# Altium PCB Tigershark 3D R1.4.PcbDoc (part 3 of 4)
Units mil, origin at the board's own origin, x right, y up, seen from the top; angles counter-clockwise.
Board outline 5500 x 4400 mil, 4 copper layers (Top Layer, Groun Plane, Power Plane, Bottom Layer); 262 components, 257 nets, 980 pads, 806 vias.
Unrouted connection lines stored in the file: 9.
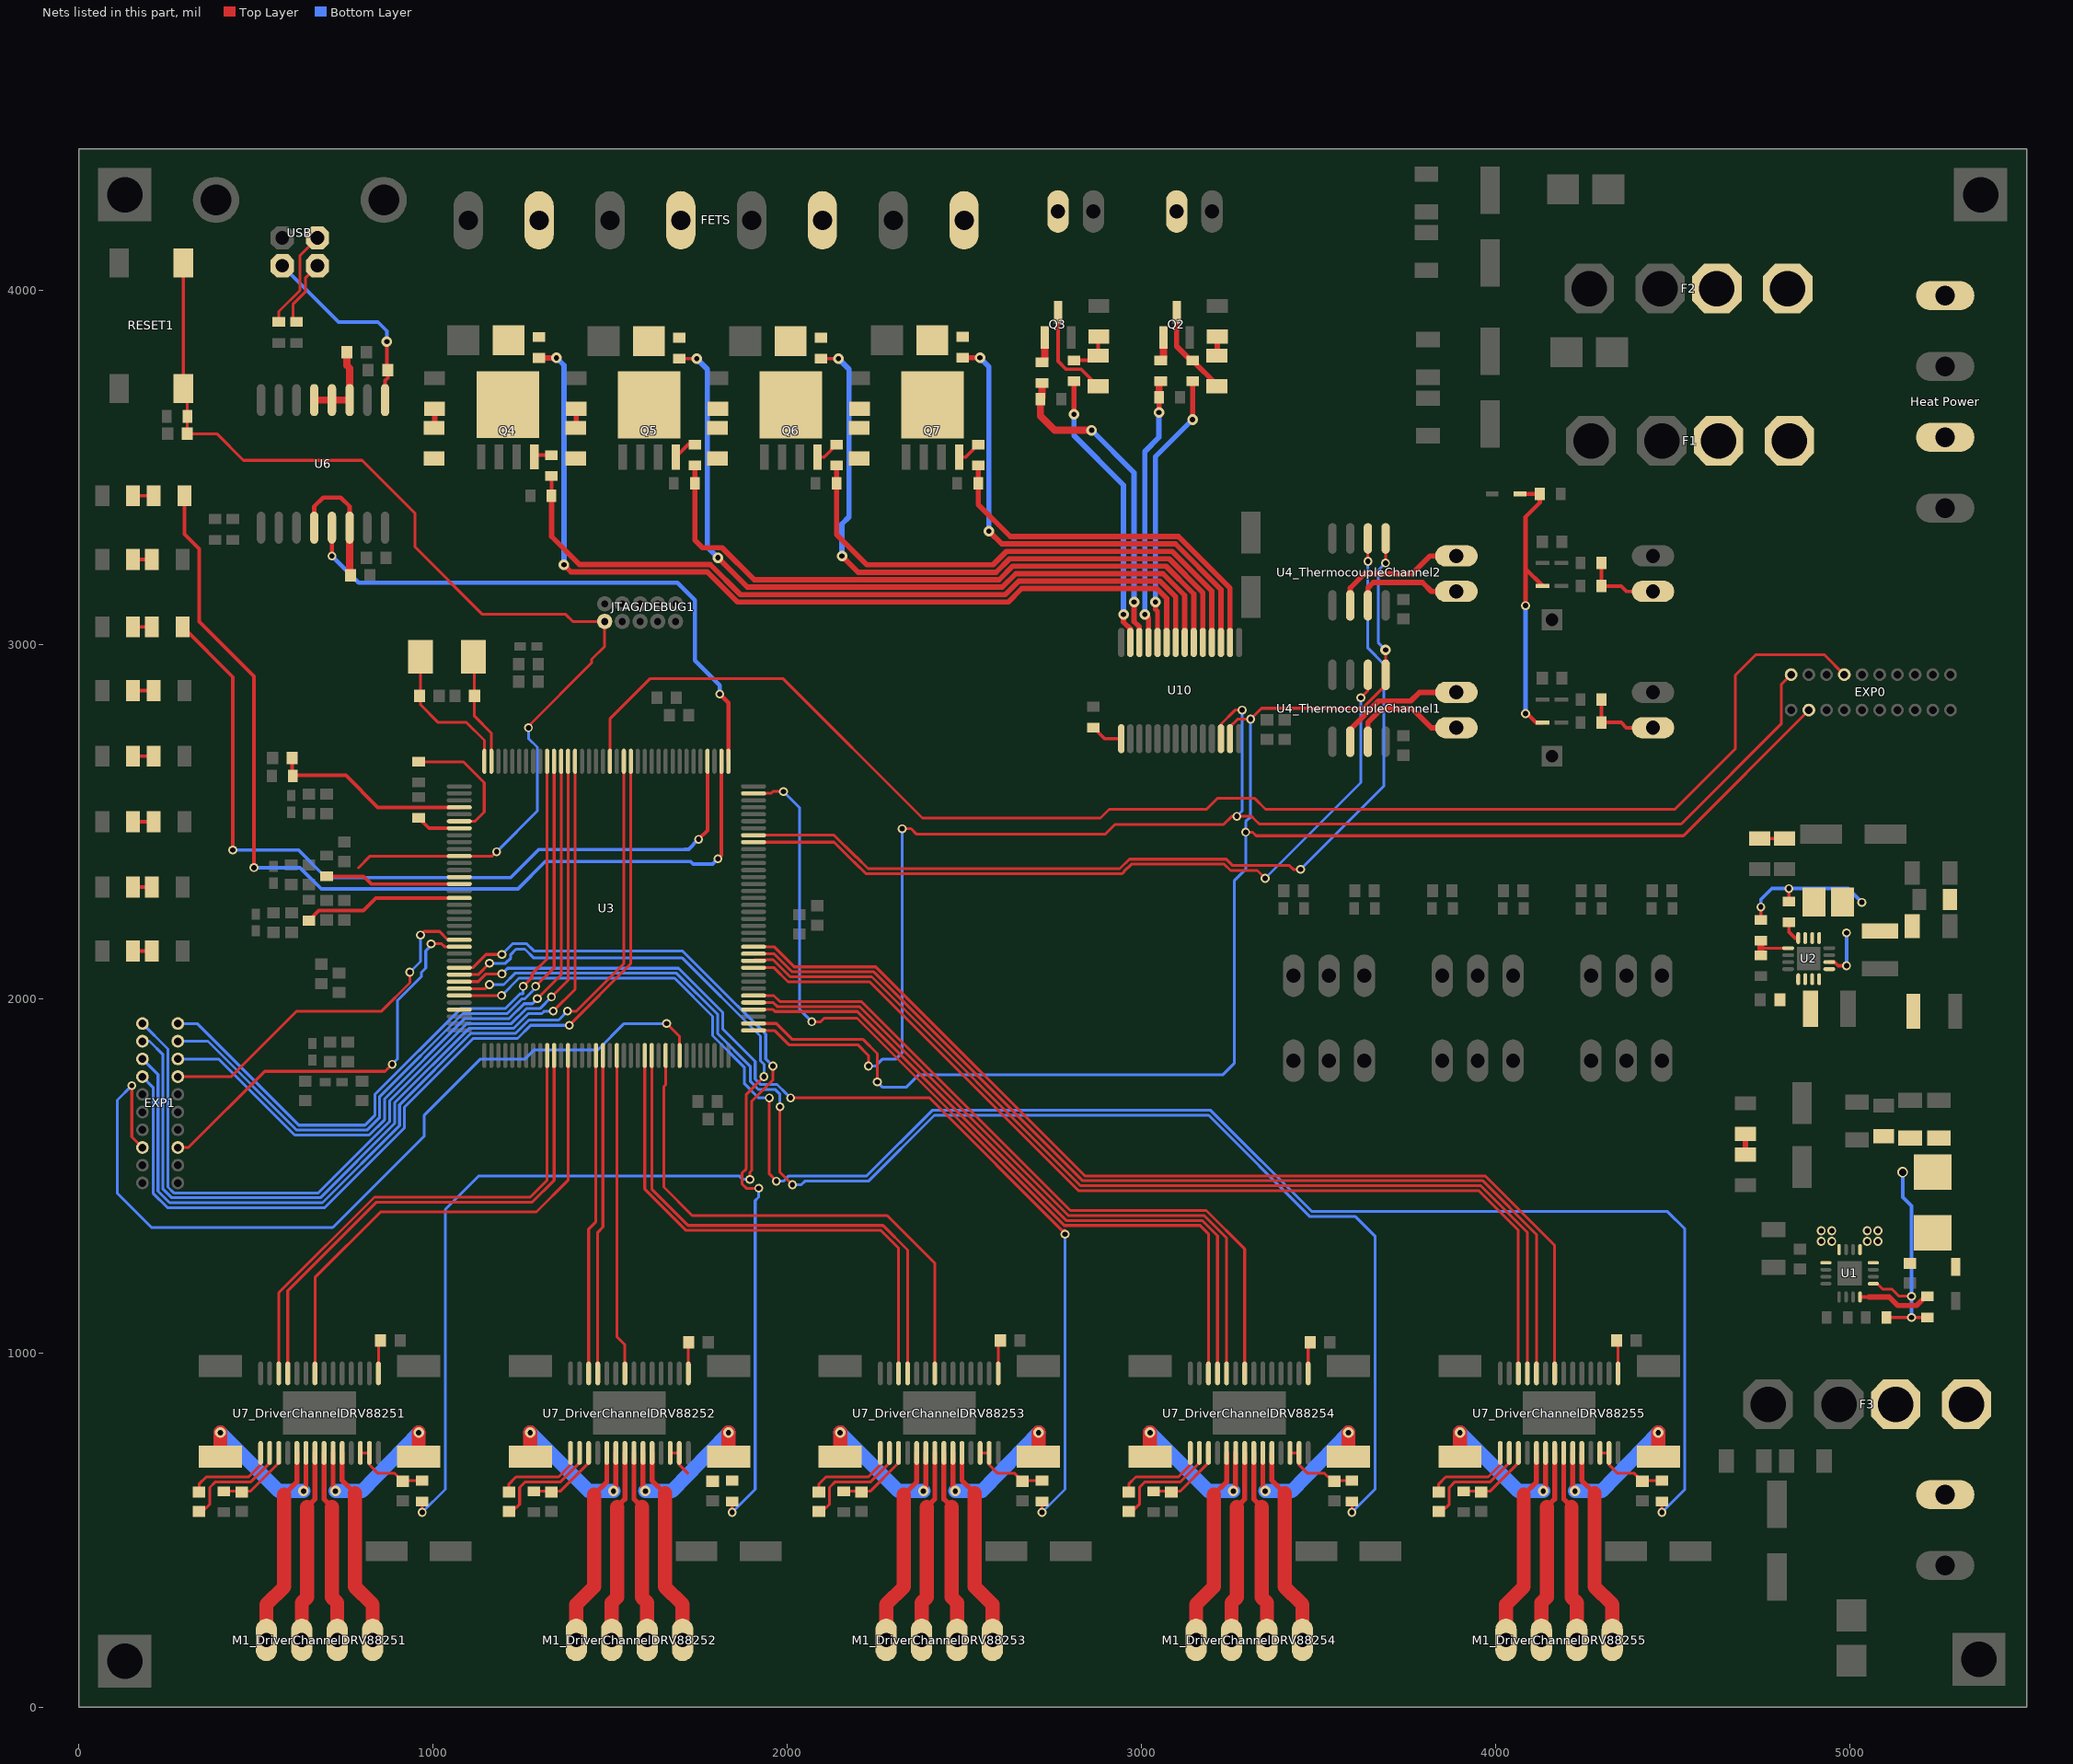
[diagram p5: the nets of this part, all layers, seen from the top]

## Via types
v1: diameter 25, hole 15, Top Layer to Bottom Layer, 373 vias
v2: diameter 30, hole 15, Top Layer to Bottom Layer, 334 vias
v3: diameter 19.68, hole 7.87, Top Layer to Bottom Layer, 75 vias
v4: diameter 50, hole 28, Top Layer to Bottom Layer, 12 vias
v5: diameter 50, hole 20, Top Layer to Bottom Layer, 9 vias
v6: diameter 30, hole 20, Top Layer to Bottom Layer, 3 vias

## Nets (pads, with @x,y where several pads share a name; then routed paths per layer and width w, separated by ;. In a path a pad name is that pad's centre, name@x,y a point inside that pad or via, vN(x,y) a via of type N, cw(c..) or ccw(c..) an arc to the next point about the centre after c; other vN are vias at no path point) (continued)
MOD0E4: U3.113 U7_DriverChannelDRV88254.24 | length 1993.5
  Top Layer w8: U3.113@1905.35,1989.25 1960.75,1989.25 1972.12,1977.88 2204.33,1977.88 2794.21,1388 3177.8,1388 3241.02,1324.78 U7_DriverChannelDRV88254.24@3241.02,942.2
MOD0E5: U3.120 U7_DriverChannelDRV88255.24 | length 2931.4
  Top Layer w8: U3.120@1905.35,2127.05 1963.56,2127.05 2014.72,2075.88 2244.92,2075.88 2834.8,1486 3964.8,1486 4116.02,1334.78 U7_DriverChannelDRV88255.24@4116.02,942.2
MOD1E1: U3.83 U7_DriverChannelDRV88251.25 | length 1466.6
  Top Layer w8: U7_DriverChannelDRV88251.25@590.43,942.2 590.43,1175.63 840.8,1426 1280.8,1426 1342.36,1487.56 U3.83@1342.36,1839.65
MOD1E2: U3.90 U7_DriverChannelDRV88252.25 | length 903.5
  Top Layer w8: U7_DriverChannelDRV88252.25@1465.43,942.2 1465.43,1340.43 1480.16,1355.16 U3.90@1480.16,1839.65
MOD1E3: U3.97 U7_DriverChannelDRV88253.25 | length 1519
  Top Layer w8: U3.97@1617.95,1839.65 1617.95,1462.85 1720.8,1360 2271.01,1360 2340.43,1290.57 U7_DriverChannelDRV88253.25@2340.43,942.2
MOD1E4: U3.112 U7_DriverChannelDRV88254.25 | length 1963.1
  Top Layer w8: U3.112@1905.35,1969.57 1960.43,1969.57 1966.12,1963.88 2198.53,1963.88 2788.41,1374 3172.01,1374 3215.43,1330.57 U7_DriverChannelDRV88254.25@3215.43,942.2
MOD1E5: U3.119 U7_DriverChannelDRV88255.25 | length 2903.2
  Top Layer w8: U3.119@1905.35,2107.36 1907.99,2110 1960.8,2110 2008.92,2061.88 2239.12,2061.88 2829.01,1472 3959.01,1472 4090.43,1340.57 U7_DriverChannelDRV88255.25@4090.43,942.2
MOD2E1: U3.82 U7_DriverChannelDRV88251.26 | length 1469.1
  Top Layer w8: U7_DriverChannelDRV88251.26@564.84,942.2 564.84,1169.84 835,1440 1275,1440 1322.68,1487.68 U3.82@1322.68,1839.65
MOD2E2: U3.89 U7_DriverChannelDRV88252.26 | length 906
  Top Layer w8: U7_DriverChannelDRV88252.26@1439.84,942.2 1439.84,1349.84 1460.47,1370.47 U3.89@1460.47,1839.65
MOD2E3: U3.96 U7_DriverChannelDRV88253.26 | length 1516.6
  Top Layer w8: U3.96@1598.27,1839.65 1598.27,1462.74 1715.01,1346 2265.21,1346 2314.84,1296.36 U7_DriverChannelDRV88253.26@2314.84,942.2
MOD2E4: U3.143 U7_DriverChannelDRV88254.26 | length 2540.2
  Top Layer w8: U3.143@1905.35,2579.8 1954.8,2579.8 1960,2585 v1(1990,2585) ; v1(2070,1935) 2095,1935 2105,1945 2197.61,1945 2782.61,1360 3166.21,1360 3189.84,1336.36 U7_DriverChannelDRV88254.26@3189.84,942.2
  Bottom Layer w8: v1(1990,2585) 2035,2540 2035,1970 v1(2070,1935)
MOD2E5: U3.118 U7_DriverChannelDRV88255.26 | length 2870.7
  Top Layer w8: U3.118@1905.35,2087.68 1963.33,2087.68 2003.12,2047.88 2233.32,2047.88 2823.21,1458 3953.21,1458 4064.84,1346.36 U7_DriverChannelDRV88255.26@4064.84,942.2
MODE0_EXP1: EXP1.1 U3.24 | length 2529.4
  Top Layer w8: v1(1335,2005) 1381.73,2051.73 U3.24@1381.73,2670.35
  Bottom Layer w8: EXP1.1@180,1930 252,1858 252,1468.4 268.4,1452 676.75,1452 878,1653.25 878,1711.95 1096.05,1930 1221.61,1930 1263.61,1972 1302,1972 v1(1335,2005)
MODE0_EXP2: EXP1.20 U3.27 | length 1965.7
  Top Layer w8: v1(1255,2035) 1280,2060 1280,2070 1322.68,2112.68 U3.27@1322.68,2670.35
  Bottom Layer w8: EXP1.20@280,1930 334.6,1930 621.6,1643 808.36,1643 836,1670.64 836,1729.34 1078.66,1972 1204.21,1972 1246.21,2014 1254,2014 1255,2015 v1(1255,2035)
MODE1_EXP1: EXP1.2 U3.23 | length 2548.8
  Top Layer w8: v1(1340,1965) 1401.42,2026.42 U3.23@1401.42,2670.35
  Bottom Layer w8: EXP1.2@180,1880 200,1880 238,1842 238,1462.6 262.6,1438 682.55,1438 892,1647.45 892,1706.15 1101.85,1916 1227.41,1916 1269.41,1958 1308,1958 1315,1965 v1(1340,1965)
MODE1_EXP2: EXP1.19 U3.26 | length 1976.5
  Top Layer w8: v1(1290,2035) 1342.36,2087.36 U3.26@1342.36,2670.35
  Bottom Layer w8: EXP1.19@280,1880 364.8,1880 615.8,1629 814.15,1629 850,1664.85 850,1723.55 1084.45,1958 1210.01,1958 1252.01,2000 1260,2000 1290,2030 v1(1290,2035)
MODE2_EXP1: EXP1.3 U3.16 | length 2605.5
  Top Layer w8: v1(1380,1965) 1405.2,1965 1539.21,2099.01 U3.16@1539.21,2670.35
  Bottom Layer w8: EXP1.3@180,1830 224,1786 224,1456.8 256.8,1424 688.35,1424 906,1641.65 906,1700.35 1107.65,1902 1233.21,1902 1271.21,1940 1355,1940 v1(1380,1965)
MODE2_EXP2: EXP1.18 U3.25 | length 1996
  Top Layer w8: v1(1295,2000) 1362.05,2067.05 U3.25@1362.05,2670.35
  Bottom Layer w8: EXP1.18@280,1830 395,1830 610,1615 819.95,1615 864,1659.05 864,1717.75 1090.25,1944 1215.81,1944 1257.81,1986 1281,1986 v1(1295,2000)
MOSI: EXP0.20 U3.109 U10.12 | length 4336.7
  Top Layer w8: U3.109@1905.35,1910.51 1964.49,1910.51 2005,1870 2200,1870 2230,1840 v1(2230,1810) ; v1(2325,2480) 2350,2480 2365,2465 2899.08,2465 2926,2491.93 3232.34,2491.93 3255.41,2515 v1(3270,2515) 3311.62,2515 3321.5,2505.12 3321.5,2504.91 3333.41,2493 4524.41,2493 4807,2775.59 4807,2887 EXP0.20@4835,2915 ; U10.12@3225.16,2734.17 3225.16,2775.16 3265,2815 v1(3285,2815)
  Bottom Layer w8: v1(2230,1810) 2250,1810 2270,1830 2307.59,1830 2325,1847.41 v1(2325,2480) ; v1(3270,2515) 3285,2530 v1(3285,2815)
NetC4_1: C4.1 C52.1 FB3.1 L2.2 R12.2 R37.2 U2.14 | length 554.1
  Top Layer w10: R37.2@4749.55,2222.71 v1(4749.55,2259.18) ; R12.2@4828.55,2274.71 v1(4828.55,2311.18) ; U2.14@4942.62,2103.34 4957.51,2103.34 4967.67,2093.18 v1(4991.55,2093.18)
  Bottom Layer w10: v1(4749.55,2259.18) 4749.55,2280.18 4780.55,2311.18 v1(4828.55,2311.18) 4995.55,2311.18 v1(5034.55,2272.18) ; v1(4991.55,2093.18) v1(4991.55,2186.18)
NetC22_1: C22.1 F4.1 U2.10 U2.11 U2.12 U2.13
NetC24_2: C24.2 U2.9
NetC43_2: C43.2 U3.36 X2.1 | length 416.3
  Top Layer w8: X2.1@965,2965 965,2830 1015,2780 1095,2780 1145.51,2729.49 U3.36@1145.51,2670.35
NetC44_2: C44.2 U3.35 X2.2 | length 315.6
  Top Layer w8: X2.2@1114.61,2965 1117.56,2962.05 C44.2@1117.56,2855 1117.56,2797.44 1165.2,2749.8 U3.35@1165.2,2670.35
NetC56_2: C56.2 U6.12 U6.14 | length 373.4
  Top Layer w12: U6.12@665,3329.88 665,3390 690,3415 740,3415 765,3390 U6.14@765,3329.88
  Top Layer w22: C56.2@765,3197.44 U6.14@765,3329.88
NetC58_2: C58.2 U6.1 USB.1 | length 566.7
  Top Layer w10: U6.1@865,3690.12 865,3745 872.56,3752.56 C58.2@872.56,3775 ; C58.2@870,3777.56 v2(870,3855)
  Bottom Layer w10: USB.1@575,4069 734,3910 845,3910 870,3885 v2(870,3855)
NetC59_2: C59.2 U6.3 U6.4 U6.5 | length 238
  Top Layer w20: U6.5@665,3690.12 U6.4@715,3690.12 U6.3@765,3690.12 765,3780 757.44,3787.56 C59.2@757.44,3825
NetC66_DriverChannelDRV88251_2: C66_DriverChannelDRV88251.2 R30_DriverChannelDRV88251.2 U7_DriverChannelDRV88251.3 | length 216.1
  Top Layer w8: R30_DriverChannelDRV88251.2@410,609.53 484.53,609.53 564.84,689.84 U7_DriverChannelDRV88251.3@564.84,717.8
NetC66_DriverChannelDRV88252_2: C66_DriverChannelDRV88252.2 R30_DriverChannelDRV88252.2 U7_DriverChannelDRV88252.3 | length 216.1
  Top Layer w8: R30_DriverChannelDRV88252.2@1285,609.53 1359.53,609.53 1439.84,689.84 U7_DriverChannelDRV88252.3@1439.84,717.8
NetC66_DriverChannelDRV88253_2: C66_DriverChannelDRV88253.2 R30_DriverChannelDRV88253.2 U7_DriverChannelDRV88253.3 | length 216.1
  Top Layer w8: R30_DriverChannelDRV88253.2@2160,609.53 2234.53,609.53 2314.84,689.84 U7_DriverChannelDRV88253.3@2314.84,717.8
NetC66_DriverChannelDRV88254_2: C66_DriverChannelDRV88254.2 R30_DriverChannelDRV88254.2 U7_DriverChannelDRV88254.3 | length 216.1
  Top Layer w8: R30_DriverChannelDRV88254.2@3035,609.53 3109.53,609.53 3189.84,689.84 U7_DriverChannelDRV88254.3@3189.84,717.8
NetC66_DriverChannelDRV88255_2: C66_DriverChannelDRV88255.2 R30_DriverChannelDRV88255.2 U7_DriverChannelDRV88255.3 | length 216.1
  Top Layer w8: R30_DriverChannelDRV88255.2@3910,609.53 3984.53,609.53 4064.84,689.84 U7_DriverChannelDRV88255.3@4064.84,717.8
NetC68_DriverChannelDRV88251_1: C68_DriverChannelDRV88251.1 U7_DriverChannelDRV88251.1 | length 256.6
  Top Layer w8: C68_DriverChannelDRV88251.1@350,607.56 340,617.56 340,630 360,650 480,650 513.66,683.66 U7_DriverChannelDRV88251.1@513.66,717.8
NetC68_DriverChannelDRV88251_2: C68_DriverChannelDRV88251.2 U7_DriverChannelDRV88251.2 | length 302.3
  Top Layer w8: C68_DriverChannelDRV88251.2@350,552.44 370,572.44 370,620 386,636 486,636 539.25,689.25 U7_DriverChannelDRV88251.2@539.25,717.8
NetC68_DriverChannelDRV88252_1: C68_DriverChannelDRV88252.1 U7_DriverChannelDRV88252.1 | length 256.6
  Top Layer w8: C68_DriverChannelDRV88252.1@1225,607.56 1215,617.56 1215,630 1235,650 1355,650 1388.66,683.66 U7_DriverChannelDRV88252.1@1388.66,717.8
NetC68_DriverChannelDRV88252_2: C68_DriverChannelDRV88252.2 U7_DriverChannelDRV88252.2 | length 302.3
  Top Layer w8: C68_DriverChannelDRV88252.2@1225,552.44 1245,572.44 1245,620 1261,636 1361,636 1414.25,689.25 U7_DriverChannelDRV88252.2@1414.25,717.8
NetC68_DriverChannelDRV88253_1: C68_DriverChannelDRV88253.1 U7_DriverChannelDRV88253.1 | length 256.6
  Top Layer w8: C68_DriverChannelDRV88253.1@2100,607.56 2090,617.56 2090,630 2110,650 2230,650 2263.66,683.66 U7_DriverChannelDRV88253.1@2263.66,717.8
NetC68_DriverChannelDRV88253_2: C68_DriverChannelDRV88253.2 U7_DriverChannelDRV88253.2 | length 302.3
  Top Layer w8: C68_DriverChannelDRV88253.2@2100,552.44 2120,572.44 2120,620 2136,636 2236,636 2289.25,689.25 U7_DriverChannelDRV88253.2@2289.25,717.8
NetC68_DriverChannelDRV88254_1: C68_DriverChannelDRV88254.1 U7_DriverChannelDRV88254.1 | length 256.6
  Top Layer w8: C68_DriverChannelDRV88254.1@2975,607.56 2965,617.56 2965,630 2985,650 3105,650 3138.66,683.66 U7_DriverChannelDRV88254.1@3138.66,717.8
NetC68_DriverChannelDRV88254_2: C68_DriverChannelDRV88254.2 U7_DriverChannelDRV88254.2 | length 302.3
  Top Layer w8: C68_DriverChannelDRV88254.2@2975,552.44 2995,572.44 2995,620 3011,636 3111,636 3164.25,689.25 U7_DriverChannelDRV88254.2@3164.25,717.8
NetC68_DriverChannelDRV88255_1: C68_DriverChannelDRV88255.1 U7_DriverChannelDRV88255.1 | length 256.6
  Top Layer w8: C68_DriverChannelDRV88255.1@3850,607.56 3840,617.56 3840,630 3860,650 3980,650 4013.66,683.66 U7_DriverChannelDRV88255.1@4013.66,717.8
NetC68_DriverChannelDRV88255_2: C68_DriverChannelDRV88255.2 U7_DriverChannelDRV88255.2 | length 302.3
  Top Layer w8: C68_DriverChannelDRV88255.2@3850,552.44 3870,572.44 3870,620 3886,636 3986,636 4039.25,689.25 U7_DriverChannelDRV88255.2@4039.25,717.8
NetC71_DriverChannelDRV88251_2: C71_DriverChannelDRV88251.2 U7_DriverChannelDRV88251.15 | length 94.4
  Top Layer w8: C71_DriverChannelDRV88251.2@842.44,1035 846.34,1031.1 U7_DriverChannelDRV88251.15@846.34,942.2
NetC71_DriverChannelDRV88252_2: C71_DriverChannelDRV88252.2 U7_DriverChannelDRV88252.15 | length 94.4
  Top Layer w8: C71_DriverChannelDRV88252.2@1717.44,1035 1721.34,1031.1 U7_DriverChannelDRV88252.15@1721.34,942.2
NetC71_DriverChannelDRV88253_2: C71_DriverChannelDRV88253.2 U7_DriverChannelDRV88253.15 | length 94.4
  Top Layer w8: C71_DriverChannelDRV88253.2@2592.44,1035 2596.34,1031.1 U7_DriverChannelDRV88253.15@2596.34,942.2
NetC71_DriverChannelDRV88254_2: C71_DriverChannelDRV88254.2 U7_DriverChannelDRV88254.15 | length 94.4
  Top Layer w8: C71_DriverChannelDRV88254.2@3467.44,1035 3471.34,1031.1 U7_DriverChannelDRV88254.15@3471.34,942.2
NetC71_DriverChannelDRV88255_2: C71_DriverChannelDRV88255.2 U7_DriverChannelDRV88255.15 | length 94.4
  Top Layer w8: C71_DriverChannelDRV88255.2@4342.44,1035 4346.34,1031.1 U7_DriverChannelDRV88255.15@4346.34,942.2
NetC73_2: C73.2 R23.2 U3.40 | length 558.7
  Top Layer w10: C73.2@602.56,2680 602.56,2630.75 754.25,2630.75 844.57,2540.43 U3.40@1074.65,2540.43
NetC75_DriverChannelDRV88251_2: C75_DriverChannelDRV88251.2 R31_DriverChannelDRV88251.1 U7_DriverChannelDRV88251.12 U7_DriverChannelDRV88251.13 | length 226.9
  Top Layer w8: U7_DriverChannelDRV88251.12@795.16,717.8 U7_DriverChannelDRV88251.13@820.75,717.8 820.75,684.25 845,660 892.56,660 913.03,639.53 R31_DriverChannelDRV88251.1@970,639.53
NetC75_DriverChannelDRV88252_2: C75_DriverChannelDRV88252.2 R31_DriverChannelDRV88252.1 U7_DriverChannelDRV88252.12 U7_DriverChannelDRV88252.13 | length 93.4
  Top Layer w8: U7_DriverChannelDRV88252.12@1670.16,717.8 U7_DriverChannelDRV88252.13@1695.75,717.8 1695.75,684.25 1720,660
NetC75_DriverChannelDRV88253_2: C75_DriverChannelDRV88253.2 R31_DriverChannelDRV88253.1 U7_DriverChannelDRV88253.12 U7_DriverChannelDRV88253.13 | length 226.9
  Top Layer w8: U7_DriverChannelDRV88253.12@2545.16,717.8 U7_DriverChannelDRV88253.13@2570.75,717.8 2570.75,684.25 2595,660 2642.56,660 2663.03,639.53 R31_DriverChannelDRV88253.1@2720,639.53
NetC75_DriverChannelDRV88254_2: C75_DriverChannelDRV88254.2 R31_DriverChannelDRV88254.1 U7_DriverChannelDRV88254.12 U7_DriverChannelDRV88254.13 | length 226.9
  Top Layer w8: U7_DriverChannelDRV88254.12@3420.16,717.8 U7_DriverChannelDRV88254.13@3445.75,717.8 3445.75,684.25 3470,660 3517.56,660 3538.03,639.53 R31_DriverChannelDRV88254.1@3595,639.53
NetC75_DriverChannelDRV88255_2: C75_DriverChannelDRV88255.2 R31_DriverChannelDRV88255.1 U7_DriverChannelDRV88255.12 U7_DriverChannelDRV88255.13 | length 226.9
  Top Layer w8: U7_DriverChannelDRV88255.12@4295.16,717.8 U7_DriverChannelDRV88255.13@4320.75,717.8 4320.75,684.25 4345,660 4392.56,660 4413.03,639.53 R31_DriverChannelDRV88255.1@4470,639.53
NetD2_1: D2.1 R19.1 | length 53.4
  Top Layer w10: D2.1@153.31,3050 R19.1@206.69,3050
NetD3_1: D3.1 R28.1 | length 53.4
  Top Layer w10: D3.1@153.31,3240 R28.1@206.69,3240
NetD7_2: D7.2 R8.1 | length 58.5
  Top Layer w15: D7.2@4706,1560 R8.1@4706,1618.46
NetD9_2: D9.2 R11.1 | length 70.5
  Top Layer w10: D9.2@4746.06,2452.41 4746.13,2452.49 R11.1@4816.55,2452.49
NetD10_1: D10.1 FAN-1.2 Q2.3 R14.2 | length 235.7
  Top Layer w15: Q2.3@3100,3915 3100,3842.15 3140.04,3802.1 R14.2@3145,3802.1 3213.5,3733.6 D10.1@3213.5,3729.19
NetD10_2: D10.2 R13.2 | length 54.1
  Top Layer w15: D10.2@3213.5,3815.8 3215,3817.3 R13.2@3215,3869.27
NetD11_1: D11.1 FAN-2.2 Q3.3 | length 280.8
  Top Layer w10: Q3.3@2765,3938.01 2765,3800.05 2787.73,3777.32 2830.37,3777.32 D11.1@2878.5,3729.19
NetD11_2: D11.2 R47.2 R48.2 | length 128.3
  Top Layer w10: R48.2@2810,3802.1 2864.8,3802.1 D11.2@2878.5,3815.8 2878.5,3867.77 R47.2@2880,3869.27
NetD12_1: D12.1 D13.1 FETS.2 Q4.5 R57.2
NetD13_2: D13.2 R56.1 | length 54.1
  Top Layer w8: D13.2@1003.5,3611.87 D13.2@1005,3613.36
  Top Layer w15: D13.2@1005,3613.36 R56.1@1005,3665.33
NetD14_1: D14.1 D15.1 FETS.4 Q5.5 R61.2
NetD14_2: D14.2 R60.1 | length 52
  Top Layer w15: D14.2@1405,3613.36 R60.1@1405,3665.33
NetD16_1: D16.1 D17.1 FETS.6 Q6.5 R65.2
NetD16_2: D16.2 R64.1
NetD18_1: D18.1 D19.1 FETS.8 Q7.5 R69.2
NetD18_2: D18.2 R68.1
NetD20_1: D20.1 R29.1 | length 53.4
  Top Layer w10: D20.1@153.31,2135 R29.1@206.69,2135
NetD21_1: D21.1 R34.1 | length 53.4
  Top Layer w10: D21.1@153.31,2315 R34.1@206.69,2315
NetD22_1: D22.1 R35.1 | length 58.4
  Top Layer w10: D22.1@153.31,2500 R35.1@211.69,2500
NetD23_1: D23.1 R36.1 | length 58.4
  Top Layer w10: D23.1@153.31,2685 R36.1@211.69,2685
NetD24_1: D24.1 R39.1 | length 58.4
  Top Layer w10: D24.1@153.31,2870 R39.1@211.69,2870
NetD25_1: D25.1 R40.1 | length 58.4
  Top Layer w8: D25.1@153.31,3420 R40.1@211.69,3420
NetF1_1: "Heat Power.3" F1.1
NetF2_1: "Heat Power.1" F2.1
NetF3_1: "Motor Power.1" F3.1
NetL2_1: L2.1 U2.1 U2.2 U2.3
NetM1_DriverChannelDRV88251_1: M1_DriverChannelDRV88251.1 U7_DriverChannelDRV88251.5 | length 563.4
  Top Layer w14: 580,600 616.02,636.02 U7_DriverChannelDRV88251.5@616.02,717.8
  Top Layer w40: M1_DriverChannelDRV88251.1@530,190 530,290 580,340 580,600
NetM1_DriverChannelDRV88251_2: M1_DriverChannelDRV88251.2 U7_DriverChannelDRV88251.7 | length 543.2
  Top Layer w14: 645,565 667.2,587.2 U7_DriverChannelDRV88251.7@667.2,717.8
  Top Layer w40: M1_DriverChannelDRV88251.2@630,190 630,295 645,310 645,565
NetM1_DriverChannelDRV88251_3: M1_DriverChannelDRV88251.3 U7_DriverChannelDRV88251.8 | length 543.2
  Top Layer w14: U7_DriverChannelDRV88251.8@692.8,717.8 692.8,587.2 715,565
  Top Layer w40: 715,565 715,310 730,295 M1_DriverChannelDRV88251.3@730,190
NetM1_DriverChannelDRV88251_4: M1_DriverChannelDRV88251.4 U7_DriverChannelDRV88251.10 | length 563.4
  Top Layer w14: U7_DriverChannelDRV88251.10@743.98,717.8 743.98,640 780,603.98
  Top Layer w40: 780,603.98 780,340 830,290 M1_DriverChannelDRV88251.4@830,190
NetM1_DriverChannelDRV88252_1: M1_DriverChannelDRV88252.1 U7_DriverChannelDRV88252.5 | length 563.4
  Top Layer w14: 1455,600 1491.02,636.02 U7_DriverChannelDRV88252.5@1491.02,717.8
  Top Layer w40: M1_DriverChannelDRV88252.1@1405,190 1405,290 1455,340 1455,600
NetM1_DriverChannelDRV88252_2: M1_DriverChannelDRV88252.2 U7_DriverChannelDRV88252.7 | length 543.2
  Top Layer w14: 1520,565 1542.2,587.2 U7_DriverChannelDRV88252.7@1542.2,717.8
  Top Layer w40: M1_DriverChannelDRV88252.2@1505,190 1505,295 1520,310 1520,565
NetM1_DriverChannelDRV88252_3: M1_DriverChannelDRV88252.3 U7_DriverChannelDRV88252.8 | length 543.2
  Top Layer w14: U7_DriverChannelDRV88252.8@1567.8,717.8 1567.8,587.2 1590,565
  Top Layer w40: 1590,565 1590,310 1605,295 M1_DriverChannelDRV88252.3@1605,190
NetM1_DriverChannelDRV88252_4: M1_DriverChannelDRV88252.4 U7_DriverChannelDRV88252.10 | length 563.4
  Top Layer w14: U7_DriverChannelDRV88252.10@1618.98,717.8 1618.98,640 1655,603.98
  Top Layer w40: 1655,603.98 1655,340 1705,290 M1_DriverChannelDRV88252.4@1705,190
NetM1_DriverChannelDRV88253_1: M1_DriverChannelDRV88253.1 U7_DriverChannelDRV88253.5 | length 563.4
  Top Layer w14: 2330,600 2366.02,636.02 U7_DriverChannelDRV88253.5@2366.02,717.8
  Top Layer w40: M1_DriverChannelDRV88253.1@2280,190 2280,290 2330,340 2330,600
NetM1_DriverChannelDRV88253_2: M1_DriverChannelDRV88253.2 U7_DriverChannelDRV88253.7 | length 543.2
  Top Layer w14: 2395,565 2417.2,587.2 U7_DriverChannelDRV88253.7@2417.2,717.8
  Top Layer w40: M1_DriverChannelDRV88253.2@2380,190 2380,295 2395,310 2395,565
NetM1_DriverChannelDRV88253_3: M1_DriverChannelDRV88253.3 U7_DriverChannelDRV88253.8 | length 543.2
  Top Layer w14: U7_DriverChannelDRV88253.8@2442.8,717.8 2442.8,587.2 2465,565
  Top Layer w40: 2465,565 2465,310 2480,295 M1_DriverChannelDRV88253.3@2480,190
NetM1_DriverChannelDRV88253_4: M1_DriverChannelDRV88253.4 U7_DriverChannelDRV88253.10 | length 563.4
  Top Layer w14: U7_DriverChannelDRV88253.10@2493.98,717.8 2493.98,640 2530,603.98
  Top Layer w40: 2530,603.98 2530,340 2580,290 M1_DriverChannelDRV88253.4@2580,190
NetM1_DriverChannelDRV88254_1: M1_DriverChannelDRV88254.1 U7_DriverChannelDRV88254.5 | length 563.4
  Top Layer w14: 3205,600 3241.02,636.02 U7_DriverChannelDRV88254.5@3241.02,717.8
  Top Layer w40: M1_DriverChannelDRV88254.1@3155,190 3155,290 3205,340 3205,600
NetM1_DriverChannelDRV88254_2: M1_DriverChannelDRV88254.2 U7_DriverChannelDRV88254.7 | length 543.2
  Top Layer w14: 3270,565 3292.2,587.2 U7_DriverChannelDRV88254.7@3292.2,717.8
  Top Layer w40: M1_DriverChannelDRV88254.2@3255,190 3255,295 3270,310 3270,565
NetM1_DriverChannelDRV88254_3: M1_DriverChannelDRV88254.3 U7_DriverChannelDRV88254.8 | length 543.2
  Top Layer w14: U7_DriverChannelDRV88254.8@3317.8,717.8 3317.8,587.2 3340,565
  Top Layer w40: 3340,565 3340,310 3355,295 M1_DriverChannelDRV88254.3@3355,190
NetM1_DriverChannelDRV88254_4: M1_DriverChannelDRV88254.4 U7_DriverChannelDRV88254.10 | length 563.4
  Top Layer w14: U7_DriverChannelDRV88254.10@3368.98,717.8 3368.98,640 3405,603.98
  Top Layer w40: 3405,603.98 3405,340 3455,290 M1_DriverChannelDRV88254.4@3455,190
NetM1_DriverChannelDRV88255_1: M1_DriverChannelDRV88255.1 U7_DriverChannelDRV88255.5 | length 563.4
  Top Layer w14: 4080,600 4116.02,636.02 U7_DriverChannelDRV88255.5@4116.02,717.8
  Top Layer w40: M1_DriverChannelDRV88255.1@4030,190 4030,290 4080,340 4080,600
NetM1_DriverChannelDRV88255_2: M1_DriverChannelDRV88255.2 U7_DriverChannelDRV88255.7 | length 543.2
  Top Layer w14: 4145,565 4167.2,587.2 U7_DriverChannelDRV88255.7@4167.2,717.8
  Top Layer w40: M1_DriverChannelDRV88255.2@4130,190 4130,295 4145,310 4145,565
NetM1_DriverChannelDRV88255_3: M1_DriverChannelDRV88255.3 U7_DriverChannelDRV88255.8 | length 543.2
  Top Layer w14: U7_DriverChannelDRV88255.8@4192.8,717.8 4192.8,587.2 4215,565
  Top Layer w40: 4215,565 4215,310 4230,295 M1_DriverChannelDRV88255.3@4230,190
NetM1_DriverChannelDRV88255_4: M1_DriverChannelDRV88255.4 U7_DriverChannelDRV88255.10 | length 563.4
  Top Layer w14: U7_DriverChannelDRV88255.10@4243.98,717.8 4243.98,640 4280,603.98
  Top Layer w40: 4280,603.98 4280,340 4330,290 M1_DriverChannelDRV88255.4@4330,190
NetP2_ThermistorChannel1_1: P2_ThermistorChannel1.1 R13_ThermistorChannel1.1 R14_ThermistorChannel1.2 | length 216.7
  Top Layer w10: R13_ThermistorChannel1.1@4299.53,2845 R14_ThermistorChannel1.2@4299.53,2780 4355,2780 4370,2765 P2_ThermistorChannel1.1@4445,2765
NetP2_ThermistorChannel2_1: P2_ThermistorChannel2.1 R13_ThermistorChannel2.1 R14_ThermistorChannel2.2 | length 216.7
  Top Layer w10: R13_ThermistorChannel2.1@4299.53,3230 R14_ThermistorChannel2.2@4299.53,3165 4355,3165 4370,3150 P2_ThermistorChannel2.1@4445,3150
NetQ2_1: Q2.1 R45.2 | length 57.4
  Top Layer w20: R45.2@3062.6,3809.7 Q2.1@3062.6,3867.14
NetQ3_1: Q3.1 R52.2 | length 62.4
  Top Layer w20: R52.2@2727.6,3804.7 Q3.1@2727.6,3867.14
NetQ4_4: Q4.4 R58.2 | length 50.5
  Top Layer w10: Q4.4@1286.5,3529.66 1291.36,3534.53 R58.2@1335,3534.53
NetQ5_4: Q5.4 R62.2 | length 68.6
  Top Layer w10: Q5.4@1686,3529.28 1721.25,3564.53 R62.2@1740,3564.53
NetQ6_4: Q6.4 R66.2 | length 68.6
  Top Layer w10: Q6.4@2086,3529.28 2104.75,3529.28 R66.2@2140,3564.53
NetQ7_4: Q7.4 R70.2 | length 68.6
  Top Layer w10: Q7.4@2486,3529.28 2504.75,3529.28 R70.2@2540,3564.53
NetR4_1: R4.1 U3.51 | length 383.6
  Top Layer w10: R4.1@700,2345.47 804.53,2345.47 826.1,2323.9 U3.51@1074.65,2323.9
NetR5_2: R5.2 U3.42 | length 358.7
  Top Layer w8: R5.2@975,2669.06 1085.94,2669.06 1145,2610 1145,2526.77 1119.29,2501.06 U3.42@1074.65,2501.06
NetR6_1: R6.1 U3.53 | length 451.8
  Top Layer w10: R6.1@650,2220.47 650,2221.46 677.73,2249.19 804.19,2249.19 839.53,2284.53 U3.53@1074.65,2284.53
NetR12_1: R12.1 U2.4 | length 60.4
  Top Layer w10: R12.1@4828.55,2215.65 4828.55,2189.18 4846.48,2171.25 U2.4@4855.02,2171.25
NetR14_1: R14.1 U10.24 | length 783.2
  Top Layer w14: v2(3040,3120) 3040,3100 3046.02,3093.98 U10.24@3046.02,3005.83 ; v2(3145,3635) R14.1@3145,3743.05
  Bottom Layer w14: v2(3040,3120) 3040,3530 v2(3145,3635)
NetR17_2: R17.2 U10.1 | length 91.6
  Top Layer w10: R17.2@2865,2765.47 2896.3,2734.17 U10.1@2943.66,2734.17
NetR22_2: R22.2 U3.43 | length 126.7
  Top Layer w10: R22.2@960,2510.47 989.09,2481.38 U3.43@1074.65,2481.38
NetR32_DriverChannelDRV88251_2: R32_DriverChannelDRV88251.2 U7_DriverChannelDRV88251.9 | length 483.3
  Top Layer w14: U7_DriverChannelDRV88251.9@718.39,717.8 718.39,616.61 v2(725,610)
  Top Layer w40: R32_DriverChannelDRV88251.2@960,707.05 v2(960,775)
  Bottom Layer w40: v2(725,610) 800,610 v2(960,775)
NetR32_DriverChannelDRV88252_2: R32_DriverChannelDRV88252.2 U7_DriverChannelDRV88252.9 | length 483.3
  Top Layer w14: U7_DriverChannelDRV88252.9@1593.39,717.8 1593.39,616.61 v2(1600,610)
  Top Layer w40: R32_DriverChannelDRV88252.2@1835,707.05 v2(1835,775)
  Bottom Layer w40: v2(1600,610) 1675,610 v2(1835,775)
NetR32_DriverChannelDRV88253_2: R32_DriverChannelDRV88253.2 U7_DriverChannelDRV88253.9 | length 483.3
  Top Layer w14: U7_DriverChannelDRV88253.9@2468.39,717.8 2468.39,616.61 v2(2475,610)
  Top Layer w40: R32_DriverChannelDRV88253.2@2710,707.05 v2(2710,775)
  Bottom Layer w40: v2(2475,610) 2550,610 v2(2710,775)
NetR32_DriverChannelDRV88254_2: R32_DriverChannelDRV88254.2 U7_DriverChannelDRV88254.9 | length 483.3
  Top Layer w14: U7_DriverChannelDRV88254.9@3343.39,717.8 3343.39,616.61 v2(3350,610)
  Top Layer w40: R32_DriverChannelDRV88254.2@3585,707.05 v2(3585,775)
  Bottom Layer w40: v2(3350,610) 3425,610 v2(3585,775)
NetR32_DriverChannelDRV88255_2: R32_DriverChannelDRV88255.2 U7_DriverChannelDRV88255.9 | length 483.3
  Top Layer w14: U7_DriverChannelDRV88255.9@4218.39,717.8 4218.39,616.61 v2(4225,610)
  Top Layer w40: R32_DriverChannelDRV88255.2@4460,707.05 v2(4460,775)
  Bottom Layer w40: v2(4225,610) 4300,610 v2(4460,775)
NetR33_DriverChannelDRV88251_2: R33_DriverChannelDRV88251.2 U7_DriverChannelDRV88251.6 | length 481.8
  Top Layer w14: v2(635,610) 641.61,616.61 U7_DriverChannelDRV88251.6@641.61,717.8
  Top Layer w40: R33_DriverChannelDRV88251.2@400,707.05 v2(400,775)
  Bottom Layer w40: v2(400,775) 565,610 v2(635,610)
NetR33_DriverChannelDRV88252_2: R33_DriverChannelDRV88252.2 U7_DriverChannelDRV88252.6 | length 481.8
  Top Layer w14: v2(1510,610) 1516.61,616.61 U7_DriverChannelDRV88252.6@1516.61,717.8
  Top Layer w40: R33_DriverChannelDRV88252.2@1275,707.05 v2(1275,775)
  Bottom Layer w40: v2(1275,775) 1440,610 v2(1510,610)
NetR33_DriverChannelDRV88253_2: R33_DriverChannelDRV88253.2 U7_DriverChannelDRV88253.6 | length 481.8
  Top Layer w14: v2(2385,610) 2391.61,616.61 U7_DriverChannelDRV88253.6@2391.61,717.8
  Top Layer w40: R33_DriverChannelDRV88253.2@2150,707.05 v2(2150,775)
  Bottom Layer w40: v2(2150,775) 2315,610 v2(2385,610)
NetR33_DriverChannelDRV88254_2: R33_DriverChannelDRV88254.2 U7_DriverChannelDRV88254.6 | length 481.8
  Top Layer w14: v2(3260,610) 3266.61,616.61 U7_DriverChannelDRV88254.6@3266.61,717.8
  Top Layer w40: R33_DriverChannelDRV88254.2@3025,707.05 v2(3025,775)
  Bottom Layer w40: v2(3025,775) 3190,610 v2(3260,610)
NetR33_DriverChannelDRV88255_2: R33_DriverChannelDRV88255.2 U7_DriverChannelDRV88255.6 | length 481.8
  Top Layer w14: v2(4135,610) 4141.61,616.61 U7_DriverChannelDRV88255.6@4141.61,717.8
  Top Layer w40: R33_DriverChannelDRV88255.2@3900,707.05 v2(3900,775)
  Bottom Layer w40: v2(3900,775) 4065,610 v2(4135,610)
NetR37_1: R37.1 R38.2 U2.5 | length 117.4
  Top Layer w8: 4750.02,2142.71 U2.5@4826.48,2142.71
  Top Layer w20: R38.2@4749.55,2122.71 R37.1@4749.55,2163.65
NetR45_1: R45.1 R46.1 U10.25 | length 760.5
  Top Layer w8: R45.1@3050.47,3738.52 R45.1@3055,3743.05
  Top Layer w15: v2(3010,3085) 3020.43,3074.57 U10.25@3020.43,3005.83 ; v2@3050.47,3654.53 R46.1@3050.47,3697.58
  Top Layer w20: R46.1@3050.47,3697.58 R45.1@3050.47,3738.52
  Bottom Layer w15: v2(3010,3085) 3010,3545 3050,3585 v2(3050,3655)
NetR48_1: R48.1 U10.27 | length 803.2
  Top Layer w15: v2(2810,3650) R48.1@2810,3743.05 ; v2(2950,3085) 2950,3063.59 2969.25,3044.34 U10.27@2969.25,3005.83
  Bottom Layer w15: v2(2810,3650) 2810,3590 2950,3450 v2(2950,3085)
NetR52_1: R52.1 R55.1 U10.26 | length 910.8
  Top Layer w8: R55.1@2715.47,3692.58 R55.1@2720,3697.1
  Top Layer w15: v2(2980,3120) 2980,3065 2994.84,3050.16 U10.26@2994.84,3005.83
  Top Layer w20: R55.1@2715.47,3692.58 2715.47,3645.47 2755.94,3605 v2(2860,3605) ; R55.1@2720,3697.1 R52.1@2720,3738.05
  Bottom Layer w15: v2(2860,3605) 2980,3485 v2(2980,3120)
NetR57_1: R57.1 U10.23 | length 2538.8
  Top Layer w15: R57.1@1300,3809.11 v2(1349.11,3809.11) ; v2(1370,3225) 1390,3205 1775,3205 1860,3120 2625,3120 2663,3158 3044.11,3158 3071.61,3130.5 U10.23@3071.61,3005.83
  Bottom Layer w15: v2(1349.11,3809.11) 1370,3788.22 v2(1370,3225)
NetR58_1: R58.1 R59.1 U10.22 | length 2163.5
  Top Layer w10: R59.1@1335,3420 R58.1@1335,3475.47
  Top Layer w15: R59.1@1335,3420 1335,3305 1414,3226 1783.7,3226 1868.7,3141 2616.3,3141 2654.3,3179 3052.81,3179 3097.2,3134.6 U10.22@3097.2,3005.83
NetR61_1: R61.1 U10.21 | length 2162.2
  Top Layer w10: R61.1@1696,3807.11 v2(1745.11,3807.11)
  Top Layer w15: v2(1805,3245) 1888,3162 2607.6,3162 2645.6,3200 3061.51,3200 3122.8,3138.71 U10.21@3122.8,3005.83
  Bottom Layer w15: v2(1745.11,3807.11) 1775,3777.22 1775,3275 v2(1805,3245)
NetR62_1: R62.1 R63.1 U10.20 | length 1850.4
  Top Layer w15: R62.1@1740,3505.47 1740,3295 1761.5,3273.5 1816.8,3273.5 1907.3,3183 2598.9,3183 2636.9,3221 3070.21,3221 3148.39,3142.82 U10.20@3148.39,3005.83
NetR65_1: R65.1 U10.19 | length 1861.1
  Top Layer w10: R65.1@2096,3807.11 v2(2145.11,3807.11)
  Top Layer w15: v2(2155,3250) 2201,3204 2590.21,3204 2628.21,3242 3078.9,3242 3173.98,3146.93 U10.19@3173.98,3005.83
  Bottom Layer w15: v2(2145.11,3807.11) 2175,3777.22 2175,3360 2155,3340 v2(2155,3250)
NetR66_1: R66.1 R67.1 U10.18 | length 1497.6
  Top Layer w15: R66.1@2140,3505.47 2140,3310 2225,3225 2581.51,3225 2619.51,3263 3087.6,3263 3199.57,3151.04 U10.18@3199.57,3005.83
NetR69_1: R69.1 U10.17 | length 1421.7
  Top Layer w15: R69.1@2496,3809.75 v2(2544.75,3809.75) ; v2(2570,3320) 2606,3284 3096.3,3284 3225.16,3155.14 U10.17@3225.16,3005.83
  Bottom Layer w15: v2(2544.75,3809.75) 2570,3784.5 v2(2570,3320)
NetR70_1: R70.1 R71.1 U10.16 | length 1072.3
  Top Layer w15: R70.1@2540,3505.47 2540,3395 2630,3305 3105,3305 3250.75,3159.25 U10.16@3250.75,3005.83
NetT2_ThermocoupleChannel1_1: T2_ThermocoupleChannel1.1 U4_ThermocoupleChannel1.3 | length 343.7
  Top Layer w15: U4_ThermocoupleChannel1.3@3640,2725.51 3640,2780.55 3678.94,2819.49 3765,2819.49 3819.49,2765 T2_ThermocoupleChannel1.1@3890,2765
NetT2_ThermocoupleChannel1_2: T2_ThermocoupleChannel1.2 U4_ThermocoupleChannel1.2 | length 378.1
  Top Layer w15: U4_ThermocoupleChannel1.2@3590,2725.51 3590,2760.25 3670.24,2840.49 3761,2840.49 3785.51,2865 T2_ThermocoupleChannel1.2@3890,2865
NetT2_ThermocoupleChannel2_1: T2_ThermocoupleChannel2.1 U4_ThermocoupleChannel2.3 | length 316.1
  Top Layer w15: U4_ThermocoupleChannel2.3@3640,3110.51 3640,3160 3655,3175 3794.49,3175 3819.49,3150 T2_ThermocoupleChannel2.1@3890,3150
NetT2_ThermocoupleChannel2_2: T2_ThermocoupleChannel2.2 U4_ThermocoupleChannel2.2 | length 386.5
  Top Layer w15: U4_ThermocoupleChannel2.2@3590,3110.51 3590,3159.49 3630.51,3200 3765,3200 3815,3250 T2_ThermocoupleChannel2.2@3890,3250
NRST: U3.69
OVREF: D1.2 D11_ThermistorChannel1.2 D11_ThermistorChannel2.2 R1.1 | length 822.2
  Top Layer w12: D1.2@4069.37,3425 R1.1@4125.47,3425 4125.47,3400.47 4085,3360 4085,3213.43 ; v1@4085,2810 4115,2780 D11_ThermistorChannel1.2@4133.43,2780 ; v1(4085,3110) 4085,3213.43 ; D11_ThermistorChannel2.2@4133.43,3165 4085,3213.43
  Bottom Layer w12: v1(4085,2805) v1(4085,3110)
PG: R9.2 U1.8 | length 214
  Top Layer w10: U1.8@5029.53,1158.07 5055,1158.07
  Top Layer w15: 5055,1158.07 5111.93,1158.07 5136,1134 5189,1134 5213.07,1158.07 R9.2@5223.54,1158.07
PWR_LED: R40.2 U3.2 | length 2787.2
  Top Layer w10: R40.2@298.31,3420 298.31,3311.69 340,3270 340,3065 495,2910 v1(495,2370) ; v1(1805,2395) 1814.8,2404.8 U3.2@1814.8,2670.35
  Bottom Layer w10: v1(495,2370) 625,2370 685,2310 1240,2310 1317.5,2387.5 1727.5,2387.5 1735,2380 1790,2380 v1(1805,2395)
R_N: R18.2 USB.2 | length 191.3
  Top Layer w8: R18.2@615,3910.53 605,3920.53 605,3960.2 640,3995.2 640,4034.79 USB.2@674.21,4069
R_P: R20.2 USB.3 | length 282.7
  Top Layer w8: R20.2@565,3910.53 565,3940 625,4000 625,4098.79 USB.3@674.21,4148
REF1: R31_DriverChannelDRV88251.2 U3.63 | length 3260
  Top Layer w8: v1(970,550) R31_DriverChannelDRV88251.2@970,580.47 ; U3.63@1074.65,2087.68 1112.68,2087.68 1150,2125 v1(1195,2125) ; v1(1895,1490) 1895,1510 1900,1515 1900,1710 1960,1770 v1(1960,1810)
  Bottom Layer w8: v1(970,550) 1035,615 1035,1405 1130,1500 1865,1500 1875,1490 v1(1895,1490) ; v1(1195,2125) 1225,2155 1265,2155 1285,2135 1704.31,2135 1859.96,1979.35 1860.65,1979.35 1940,1900 1940,1830 v1(1960,1810)
REF2: R31_DriverChannelDRV88252.2 U3.64 | length 2464
  Top Layer w8: U3.64@1074.65,2067.99 1127.99,2067.99 v1(1160,2100) ; v1(1845,550) R31_DriverChannelDRV88252.2@1845,580.47 ; v1(1920,1465) 1885,1465 1872.5,1477.5 1872.5,1507.3 1885,1519.8 1885,1730 v1(1935,1780)
  Bottom Layer w8: v1(1160,2100) 1205,2100 1220,2115 1220,2125 1235,2140 1260,2140 1285,2115 1704.51,2115 1925,1894.51 1925,1825 1935,1815 v1(1935,1780) ; v1(1845,550) 1910,615 1910,1430 1920,1440 v1(1920,1465)
REF3: R31_DriverChannelDRV88253.2 U3.65 | length 2929
  Top Layer w8: U3.65@1074.65,2048.31 1128.11,2048.31 1149.8,2070 v1(1195,2070) ; v1(2010,1720) 2402.82,1720 2776.82,1346 2785,1346 v1(2785,1335) ; v1(2720,550) R31_DriverChannelDRV88253.2@2720,580.47
  Bottom Layer w8: v1(1195,2070) 1211,2086 1693.91,2086 1817.96,1961.95 1817.96,1915.22 1910,1823.18 1910,1773.18 1925.68,1757.5 1944.32,1757.5 1945.01,1758.19 1971.81,1758.19 2000,1730 ; v1(2720,550) 2785,615 v1(2785,1335)
REF4: R31_DriverChannelDRV88254.2 U3.66 | length 4096.5
  Top Layer w8: U3.66@1074.65,2028.62 1148.62,2028.62 v1(1160,2040) ; v1(1980,1695) 1980,1510 v1(2015,1475) ; v1(3595,550) R31_DriverChannelDRV88254.2@3595,580.47
  Bottom Layer w8: v1(1160,2040) 1200,2040 1232,2072 1688.11,2072 1803.96,1956.15 1803.96,1901.64 1896,1809.6 1896,1767.38 1919.88,1743.5 1950.12,1743.5 1950.81,1744.19 1965.81,1744.19 1980,1730 v1(1980,1695) ; v1(2015,1475) 2040,1475 2050,1485 2229.8,1485 2415.8,1671 3190.41,1671 3476.41,1385 3605,1385 3660,1330 3660,615 v1(3595,550)
REF5: R31_DriverChannelDRV88255.2 U3.67 | length 4981.7
  Top Layer w8: U3.67@1074.65,2008.94 v1(1193.94,2008.94) ; v1(1950,1720) 1950,1505 v1(1970,1485) ; v1(4470,550) R31_DriverChannelDRV88255.2@4470,580.47
  Bottom Layer w8: v1(1193.94,2008.94) 1243,2058 1682.32,2058 1789.96,1950.36 1789.96,1895.84 1880,1805.8 1880,1760 1920,1720 v1(1950,1720) ; v1(1970,1485) 1990,1485 2005,1500 2225,1500 2410,1685 3196.21,1685 3482.21,1399 4486,1399 4535,1350 4535,615 v1(4470,550)
REF_EXP1: EXP1.8 U3.101 | length 2478.2
  Top Layer w8: v1(150,1755) 150,1610 EXP1.8@180,1580 ; v1(1660,1930) 1696.69,1893.31 U3.101@1696.69,1839.65
  Bottom Layer w8: v1(150,1755) 109,1714 109,1450.8 205.8,1354 717.34,1354 976,1612.66 976,1671.36 1134.64,1830 1260.2,1830 1285.2,1855 1465.2,1855 1540.2,1930 v1(1660,1930)
REF_EXP2: EXP1.13 U3.60 | length 1171
  Top Layer w8: EXP1.13@280,1580 310,1580 525,1795 865,1795 v1(885,1815) ; v1(995,2155) 1025,2155 1033.27,2146.73 U3.60@1074.65,2146.73
  Bottom Layer w8: v1(885,1815) 900,1830 900,1995 967.5,2062.5 967.5,2074.32 980,2086.82 980,2135 995,2150 v1(995,2155)
RESET: C63.2 JTAG/DEBUG1.10 R21.1 RESET1.1 U3.47 | length 3144.6
  Top Layer w8: RESET1.1@295.55,4077.17 RESET1.1@295.55,3722.83 306.56,3711.83 C63.2@306.56,3595 390,3595 465,3520 800,3520 950,3370 950,3275 1140,3085 1375,3085 1395,3065 JTAG/DEBUG1.10@1485,3065 1485,2994.8 1448.5,2958.3 1448.5,2948.5 v1@1267.5,2767.5 ; 790,2370 822.64,2402.64 U3.47@1074.65,2402.64 1167.64,2402.64 v1(1180,2415)
  Bottom Layer w8: v1(1180,2415) 1295,2530 1295,2710 1270,2735 v1(1270,2765)
RX_LED: R19.2 U3.4 | length 2311.6
  Top Layer w10: R19.2@293.31,3050 435,2908.31 v1(435,2420) ; v1(1750,2450) 1775.43,2475.43 U3.4@1775.43,2670.35
  Bottom Layer w10: v1(435,2420) 620.25,2420 698.25,2342 1219.88,2342 1298.88,2421 1710.75,2421 1711.75,2422 1722,2422 v1(1750,2450)
RXD1: EXP0.17 U3.18 | length 4176.3
  Top Layer w8: U3.18@1499.84,2670.35 1499.84,2789.84 1614,2904 1988.22,2904 2382.22,2510 2884.68,2510 2909.68,2535 3184.2,2535 3214.7,2565.5 3320.52,2565.5 3351.02,2535 4507.01,2535 4677,2704.99 4677,2912.8 4735.2,2971 4929,2971 EXP0.17@4985,2915
SCLK: EXP0.2 U3.110 U4_ThermocoupleChannel1.5 U4_ThermocoupleChannel2.5 U10.13 | length 5192.7
  Top Layer w8: U3.110@1905.35,1930.2 1969.8,1930.2 2015,1885 2215,1885 2255,1845 v1(2255,1765) ; U10.13@3250.75,2734.17 3250.75,2767.73 3272.39,2789.38 v1(3308.75,2789.38) 3339.38,2820 3625,2820 3690,2885 U4_ThermocoupleChannel1.5@3690,2914.49 v2(3690,2985) ; v1(3295,2470) 3315,2470 3325,2460 4531.01,2460 4885,2813.99 EXP0.2@4885,2815 ; v1(3690,3230) U4_ThermocoupleChannel2.5@3690,3299.49
  Bottom Layer w8: v1(2255,1765) 2270,1750 2336.41,1750 2371.41,1785 3230,1785 3262.5,1817.5 3262.5,2332.5 3295,2365 v1(3295,2470) 3295,2500 3308.75,2513.75 v1(3308.75,2789.38) ; v2(3690,2985) 3669,3006 3669,3209 v1(3690,3230)
SHDN: U3.50
SPD: U3.1 U6.13 | length 1650.4
  Top Layer w12: v1(715,3250) U6.13@715,3329.88 ; v1(1810,2860) 1834.49,2835.51 U3.1@1834.49,2670.35
  Bottom Layer w12: v1(715,3250) 790,3175 1690,3175 1740,3125 1740,2955 1810,2885 v1(1810,2860)
STEP1: U3.85 U7_DriverChannelDRV88251.22 | length 1451.2
  Top Layer w8: U7_DriverChannelDRV88251.22@667.2,942.2 667.2,1212.81 852.4,1398 1292.4,1398 1381.73,1487.34 U3.85@1381.73,1839.65
STEP2: U3.92 U7_DriverChannelDRV88252.22 | length 906.8
  Top Layer w8: U3.92@1519.53,1839.65 1519.53,1045.47 1542.2,1022.8 U7_DriverChannelDRV88252.22@1542.2,942.2
STEP3: U3.99 U7_DriverChannelDRV88253.22 | length 1538.9
  Top Layer w8: U3.99@1657.32,1839.65 1657.32,1757.12 1652,1751.8 1652,1468.4 1732.4,1388 2282.6,1388 2417.2,1253.4 U7_DriverChannelDRV88253.22@2417.2,942.2
STEP4: U3.114 U7_DriverChannelDRV88254.22 | length 2034.4
  Top Layer w8: U3.114@1905.35,2008.94 1962.87,2008.94 1979.93,1991.88 2210.13,1991.88 2800.01,1402 3183.6,1402 3292.2,1293.4 U7_DriverChannelDRV88254.22@3292.2,942.2
STEP5: U3.121 U7_DriverChannelDRV88255.22 | length 2972.4
  Top Layer w8: U3.121@1905.35,2146.73 1963.67,2146.73 2020.52,2089.88 2250.72,2089.88 2840.6,1500 3970.6,1500 4167.2,1303.4 U7_DriverChannelDRV88255.22@4167.2,942.2
STEP_EXP1: EXP1.4 U3.15 | length 2598.5
  Top Layer w8: v1(1385,1925) 1558.9,2098.9 U3.15@1558.9,2670.35
  Bottom Layer w8: EXP1.4@180,1780 210,1750 210,1451.01 251.01,1410 694.15,1410 920,1635.85 920,1694.55 1113.45,1888 1239.01,1888 1276.01,1925 v1(1385,1925)
STEP_EXP2: EXP1.17 U3.59 | length 1035.7
  Top Layer w8: EXP1.17@280,1780 430.8,1780 615.8,1965 855,1965 935,2045 v1(935,2075) ; v1(965,2180) 975,2190 1018.73,2190 1040.12,2168.6 1072.46,2168.6 U3.59@1074.65,2166.42
  Bottom Layer w8: v1(935,2075) 965,2105 v1(965,2180)
SW: C7.1 D5.2 L1.1 U1.1 U1.12 U1.13 U1.16
  other v1: 4920,1315 4950,1315 5050,1315 5080,1315 4920,1345 4950,1345 5050,1345 5080,1345
SW_OUT: C8.2 C29.1 FB2.1 L1.2 R7.2 R9.1 U1.9 | length 668.1
  Top Layer w8: U1.9@5066.93,1195.47 5078.31,1195.47 5093.79,1180 5120,1180 5140,1160 v1(5175,1160)
  Top Layer w10: R7.2@5099.53,1100 v1(5175,1100) R9.1@5224.53,1100
  Bottom Layer w10: v6(5150,1510) 5150,1440 5175,1415 v1(5175,1100)
TC_CS1: U3.136 U4_ThermocoupleChannel1.6 | length 2204.2
  Top Layer w8: U3.136@1905.35,2442.01 2132.79,2442.01 2189.8,2385 2191.01,2385 2223.01,2353 2946.19,2353 2952.14,2358.95 2952.14,2359.68 2972.4,2379.93 3234.46,2379.93 3252.39,2362 3328,2362 v1(3350,2340) ; v1(3620,2850) 3640,2870 U4_ThermocoupleChannel1.6@3640,2914.49
  Bottom Layer w8: v1(3350,2340) 3620,2610 v1(3620,2850)
TC_CS2: U3.137 U4_ThermocoupleChannel2.6 | length 2657.5
  Top Layer w8: U3.137@1905.35,2461.69 2132.9,2461.69 2194.6,2400 2195.8,2400 2228.8,2367 2939.67,2367 2966.6,2393.93 3240.26,2393.93 3258.19,2376 3418.8,2376 3429.8,2365 v1(3450,2365) ; v1(3640,3235) U4_ThermocoupleChannel2.6@3640,3299.49
  Bottom Layer w8: v1(3450,2365) 3685,2600 3685,2945 3640,2990 v1(3640,3235)